# Altium PCB PSAT.PcbDoc
Units mm, origin at the board's own origin, x right, y up, seen from the top; angles counter-clockwise.
Board outline 56 x 56 mm, 2 copper layers (Top Layer, Bottom Layer); 13 components, 46 nets, 113 pads, 0 vias.
Unrouted connection lines stored in the file: 57.
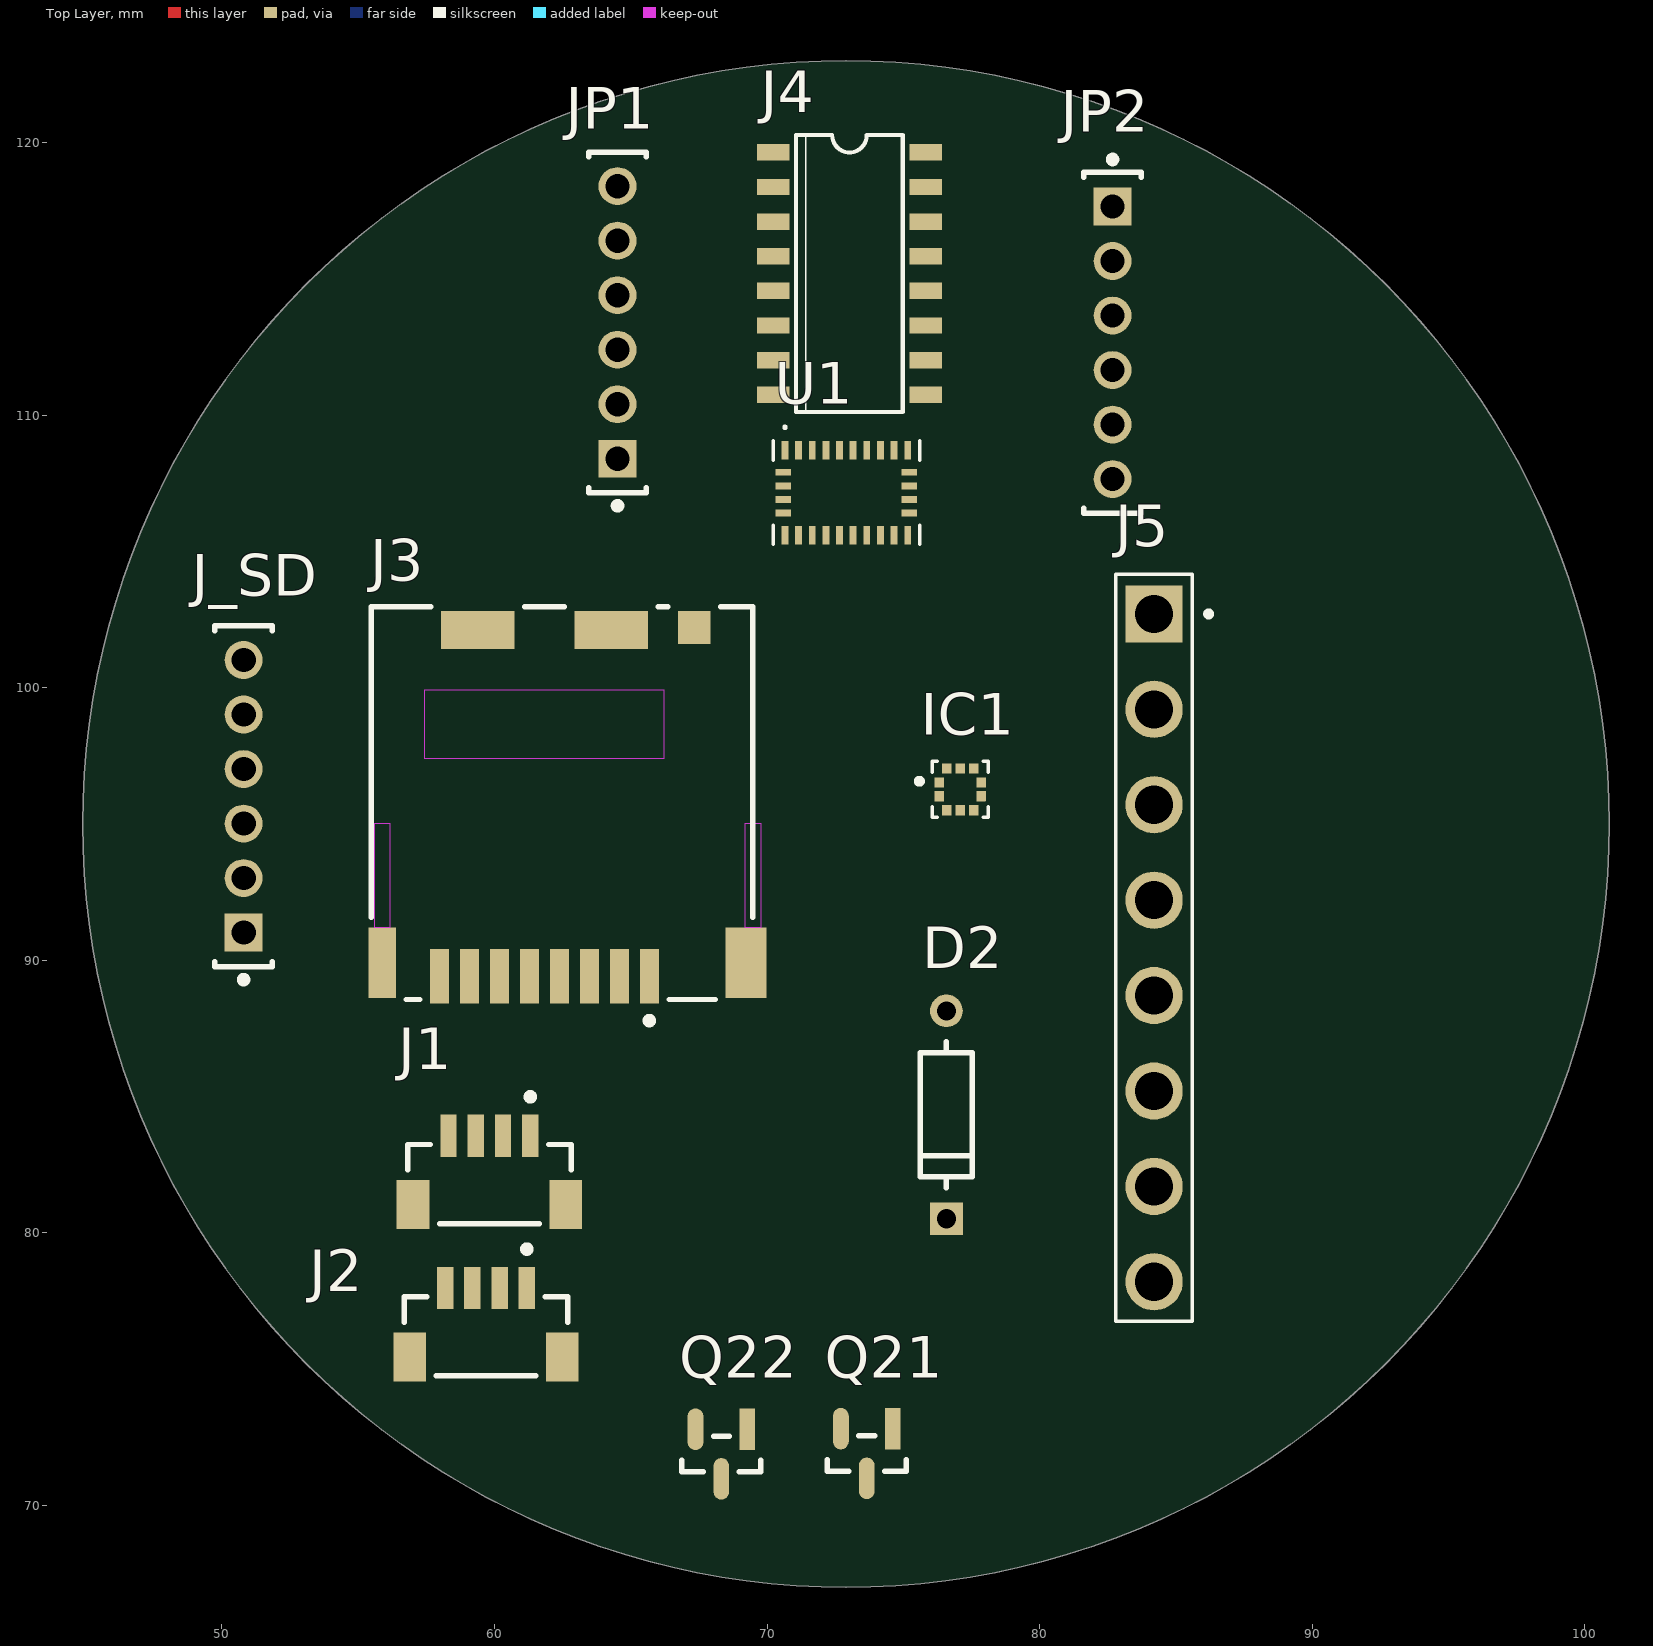
[diagram p0: Top Layer view]
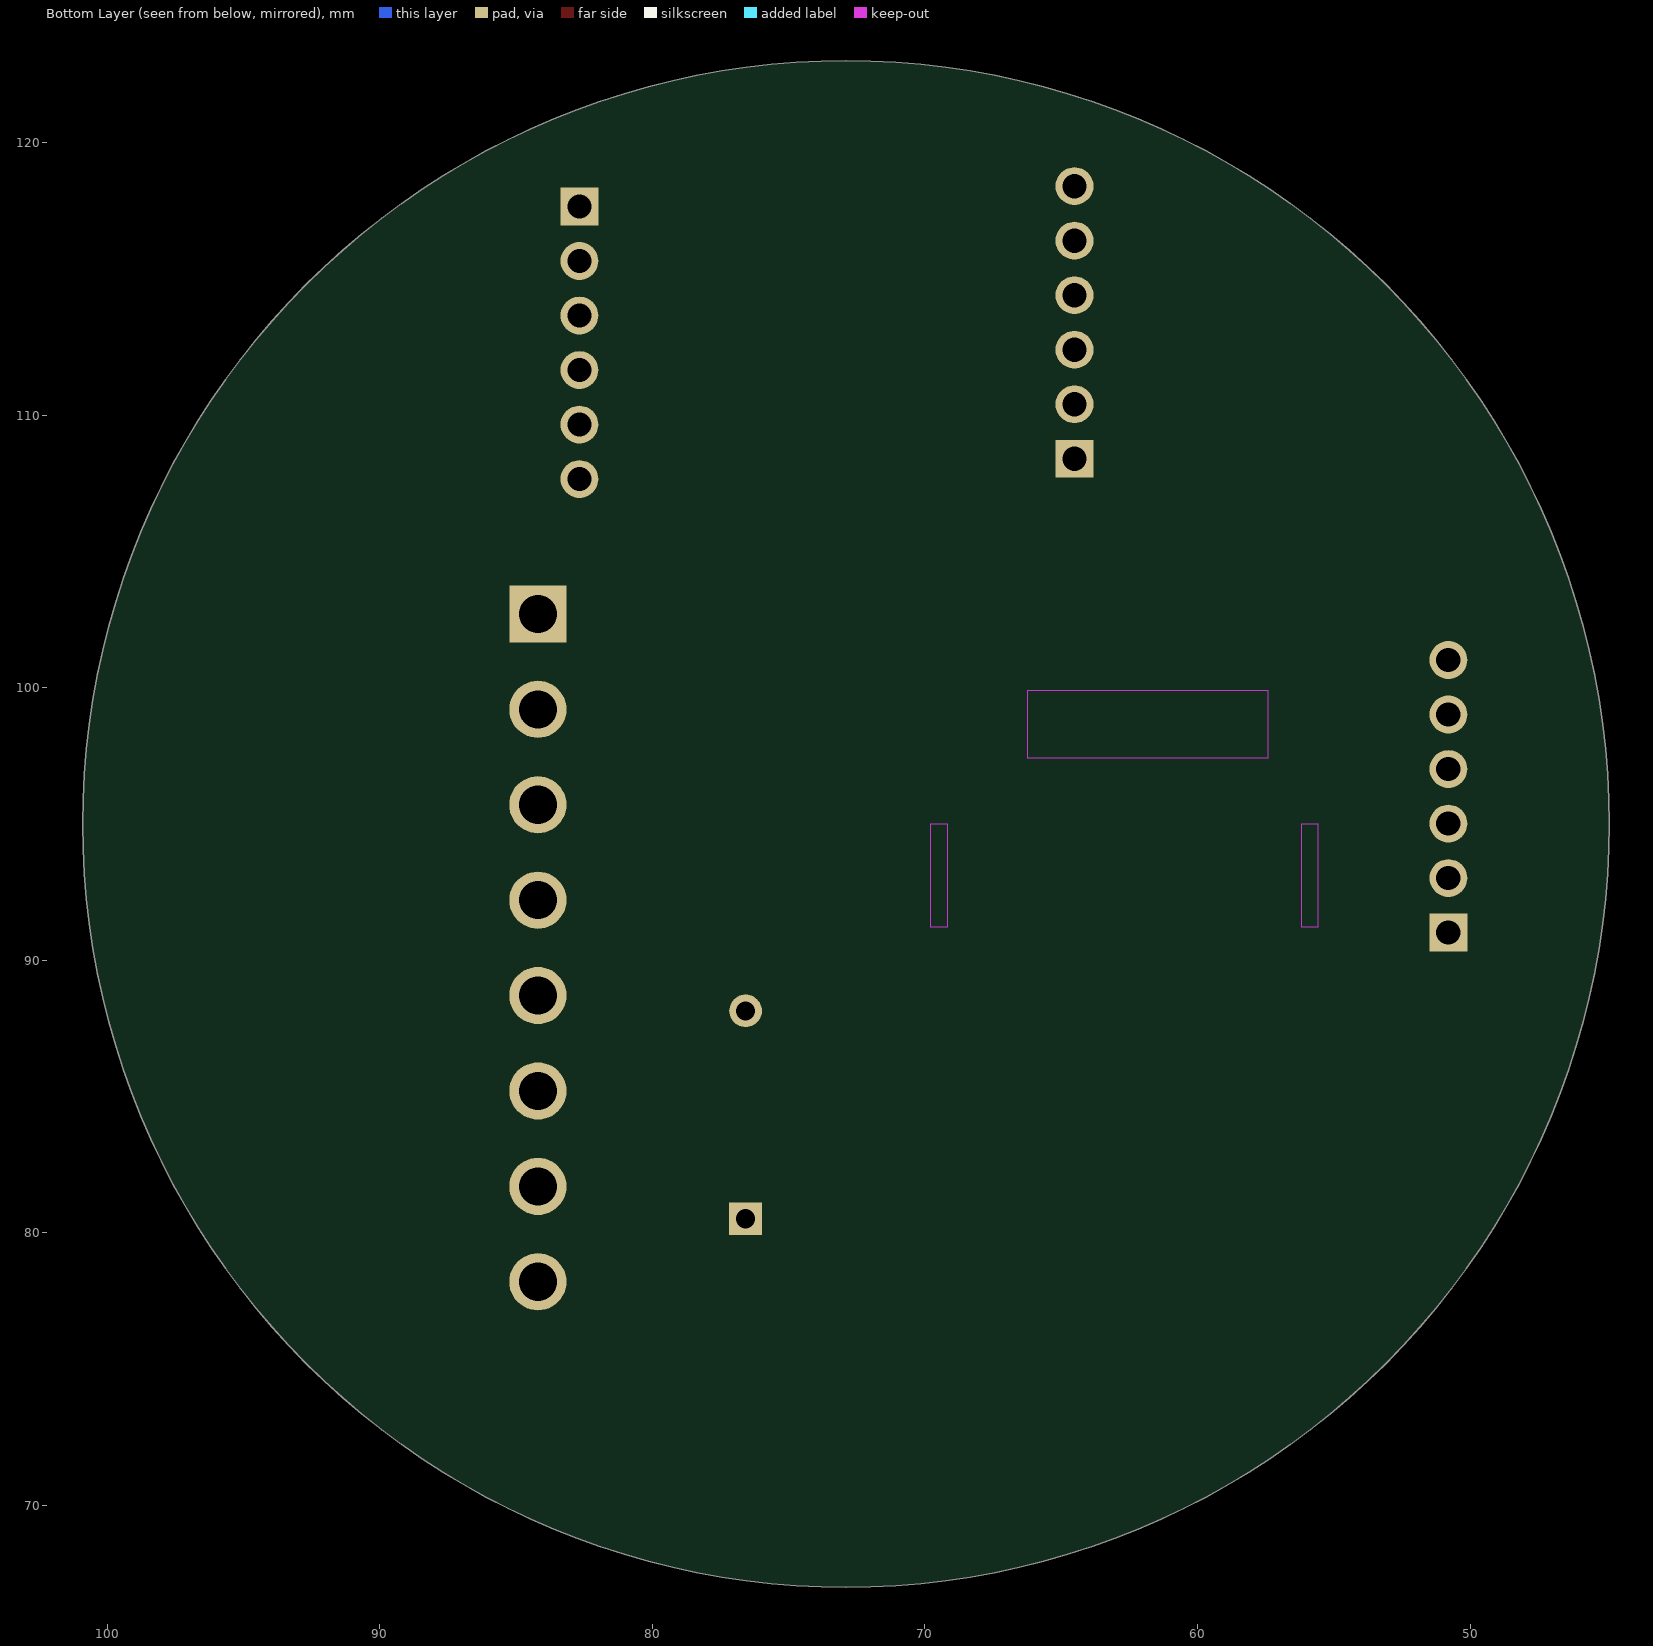
[diagram p1: Bottom Layer view, seen from below]

## Layer stack, top to bottom
Top Solder: solder mask 0.0102, Solder Resist, Dk 3.5
Top Layer: signal copper 0.0356
Dielectric 1: dielectric 0.32, FR-4, Dk 4.8
Bottom Layer: signal copper 0.0356
Bottom Solder: solder mask 0.0102, Solder Resist, Dk 3.5

## Board outline
72.898,66.996 cw(c72.898,94.996) 44.898,94.996 cw(c72.898,94.996) 72.898,122.996 cw(c72.898,94.996) 100.898,94.996 cw(c72.898,94.996)

## Design rules (kind name [scope] priority, off if disabled: settings)
Clearance [All] p1: gap=0.254 ignorepadtopadclearanceinfootprint=FALSE
PolygonConnect [All] p1: connectstyle=Relief reliefconductorwidth=0.254 reliefentries=4 polygonreliefangle="90 Angle" airgapwidth=0.254
RoutingVias [All] p1: holewidth=0.711 width=1.27 viastyle="Through Hole" minholewidth=0.711 minwidth=1.27 maxholewidth=0.711 maxwidth=1.27
SolderMaskExpansion [All] p1: expansion=0.102 istentingtop=FALSE
SupplyNets "Schematic Supply Nets_38" [InNet('NetJ3_2')] p1: voltage=0.000
SupplyNets "Schematic Supply Nets_37" [InNet('MT')] p2: voltage=0.000
SupplyNets "Schematic Supply Nets_36" [InNet('IMU_PS1')] p3: voltage=0.000
SupplyNets "Schematic Supply Nets_35" [InNet('SDA/MISO/TX')] p4: voltage=0.000
SupplyNets "Schematic Supply Nets_34" [InNet('IMU_CS')] p5: voltage=0.000
SupplyNets "Schematic Supply Nets_33" [InNet('BARO_CS')] p6: voltage=0.000
SupplyNets "Schematic Supply Nets_32" [InNet('IMU_PS0')] p7: voltage=0.000
SupplyNets "Schematic Supply Nets_30" [InNet('CS_3V')] p8: voltage=0.000
SupplyNets "Schematic Supply Nets_29" [InNet('5V')] p9: voltage=0.000
SupplyNets "Schematic Supply Nets_28" [InNet('IMU_PS1_3V')] p10: voltage=0.000
SupplyNets "Schematic Supply Nets_27" [InNet('IMU_RST')] p11: voltage=0.000
SupplyNets "Schematic Supply Nets_26" [InNet('MOSI_3V')] p12: voltage=0.000
SupplyNets "Schematic Supply Nets_25" [InNet('MCU_SCK')] p13: voltage=0.000
SupplyNets "Schematic Supply Nets_24" [InNet('MOSI')] p14: voltage=0.000
SupplyNets "Schematic Supply Nets_23" [InNet('IMU_INT')] p15: voltage=0.000
SupplyNets "Schematic Supply Nets_22" [InNet('IMU_CS_3V')] p16: voltage=0.000
SupplyNets "Schematic Supply Nets_21" [InNet('IMU_BOOT_3V')] p17: voltage=0.000
SupplyNets "Schematic Supply Nets_20" [InNet('XOUT')] p18: voltage=0.000
SupplyNets "Schematic Supply Nets_19" [InNet('SDI/SDA')] p19: voltage=0.000
SupplyNets "Schematic Supply Nets_18" [InNet('3.3V')] p20: voltage=0.000
SupplyNets "Schematic Supply Nets_17" [InNet('IMU_RST_3V')] p21: voltage=0.000
SupplyNets "Schematic Supply Nets_16" [InNet('SD_CS')] p22: voltage=0.000
SupplyNets "Schematic Supply Nets_15" [InNet('SDI_3V')] p23: voltage=0.000
SupplyNets "Schematic Supply Nets_14" [InNet('IMU_PS0_3V')] p24: voltage=0.000
SupplyNets "Schematic Supply Nets_13" [InNet('GND')] p25: voltage=0.000
SupplyNets "Schematic Supply Nets_12" [InNet('MCU_MOSI')] p26: voltage=0.000
SupplyNets "Schematic Supply Nets_11" [InNet('IMU_BOOT')] p27: voltage=0.000
SupplyNets "Schematic Supply Nets_10" [InNet('SCL/SCK/RX')] p28: voltage=0.000
SupplyNets "Schematic Supply Nets_9" [InNet('MCU_MISO')] p29: voltage=0.000
SupplyNets "Schematic Supply Nets_8" [InNet('SCK/SCL')] p30: voltage=0.000
SupplyNets "Schematic Supply Nets_7" [InNet('BARO_INT')] p31: voltage=0.000
SupplyNets "Schematic Supply Nets_6" [InNet('SDO/ADR')] p32: voltage=0.000
SupplyNets "Schematic Supply Nets_5" [InNet('SCL_3V')] p33: voltage=0.000
SupplyNets "Schematic Supply Nets_4" [InNet('BARO_CS_3V')] p34: voltage=0.000
SupplyNets "Schematic Supply Nets_3" [InNet('CDI/SDA')] p35: voltage=0.000
SupplyNets "Schematic Supply Nets_2" [InNet('SCK_3V')] p36: voltage=0.000
SupplyNets "Schematic Supply Nets_1" [InNet('SDA_3V')] p37: voltage=0.000
SupplyNets "Schematic Supply Nets" [InNet('XIN')] p38: voltage=0.000
Width [All] p1: maxlimit=0.254 minlimit=0.254 preferedwidth=0.254
30 further rules are at their usual default settings.

## Components (designator, comment, footprint, x,y, rotation, side; value= is the part's Value field where it differs from the comment)
D2 "1N4148" FP-017AG-MFG 76.581,84.328 r90 top
IC1 "BMP388" PQFN50P200X200X80-10N 77.089,96.266 r0 top
J1 "BM04B-SRSS-TBT(LF)(SN)" FP-BM04B-SRSS-TBT_LF_SN-MFG 59.817,81.788 r180 top
J2 "BM04B-SRSS-TBT(LF)(SN)" FP-BM04B-SRSS-TBT_LF_SN-MFG 59.69,76.2 r180 top
J3 "DM3CS-SF" FP-DM3CS-SF-MFG 62.484,95.758 r0 top
J4 "74HC4050D" *SO16 73.025,115.189 r270 top
J5 "1986717-8" TE_1986717-8 84.201,90.452 r270 top
J_SD "TMM-106-01-T-S" FP-TMM-106-01-T-S-MFG 50.8,96.012 r90 top
JP1 "TMM-106-01-T-S" FP-TMM-106-01-T-S-MFG 64.516,113.395 r90 top
JP2 "TMM-106-01-T-S" FP-TMM-106-01-T-S-MFG 82.677,112.649 r270 top
Q21 "BSS138" FP-318-08-IPC_B 73.66,71.903 r270 top
Q22 "BSS138" FP-318-08-IPC_B 68.326,71.882 r270 top
U1 "BNO085" IC_BNO085 72.91,107.15 r0 top

## Footprints (in the part's own frame and the unit in brackets; to place one, negate y for a bottom-side part, rotate by r counter-clockwise, add the part's x,y. Pads: shape width x height; smd on the part's side, far side on the other; paste and mask are expansions set on the pad)
*SO16 [mm]
  rect 0.6x1.2 smd: 1(-4.445,-2.8) 2(-3.175,-2.8) 3(-1.905,-2.8) 4(-0.635,-2.8) 5(0.635,-2.8) 6(1.905,-2.8) 7(3.175,-2.8) 8(4.445,-2.8) 9(4.445,2.8) 10(3.175,2.8) 11(1.905,2.8) 12(0.635,2.8) 13(-0.635,2.8) 14(-1.905,2.8) 15(-3.175,2.8) 16(-4.445,2.8)
  silkscreen extent -5.08,-1.96 5.08,1.96
FP-017AG-MFG [mm]
  rect 1.2x1.2 hole 0.7 paste-2539.97 mask+0: 1(-3.813,0)
  round 1.2 hole 0.7 paste-2539.97 mask+0: 2(3.813,0)
  silkscreen extent -2.68,-0.95 2.68,0.95, body extent -4.51,-1.05 4.51,1.05, height 0.25
FP-318-08-IPC_B [mm]
  rect 1.524x0.578 smd paste+0 mask+0: 1(-0.91,0.95)
  rrect100% 1.524x0.578 smd paste+0 mask+0: 2(-0.91,-0.95) 3(0.91,0)
  silkscreen extent -0.65,-1.45 0.65,1.45, body extent -1.92,-1.7 1.92,1.7, height 0.25
FP-BM04B-SRSS-TBT_LF_SN-MFG [mm]
  rect 0.6x1.55 smd paste+0 mask+0: 1(-1.5,-1.775) 2(-0.5,-1.775) 3(0.5,-1.775) 4(1.5,-1.775)
  rect 1.2x1.8 smd paste+0 mask+0: 5(-2.8,0.75) 6(2.8,0.75)
  silkscreen extent -3,-3.32 3,1.45, body extent -3.5,-2.65 3.5,1.75, height 0.25
FP-DM3CS-SF-MFG [mm]
  rect 0.7x2 smd paste+0 mask+0: 1(3.2,-6.35) 2(2.1,-6.35) 3(1,-6.35) 4(-0.1,-6.35) 5(-1.2,-6.35) 6(-2.3,-6.35) 7(-3.4,-6.35) 8(-4.5,-6.35)
  rect 2.7x1.4 smd paste+0 mask+0: 9(-3.1,6.35) 10(1.8,6.35)
  rect 1.2x1.2 smd paste+0 mask+0: 11(4.85,6.45)
  rect 1x2.6 smd paste+0 mask+0: 12(-6.6,-5.85)
  rect 1.5x2.6 smd paste+0 mask+0: 13(6.75,-5.85)
  Keep-Out Layer region: -6.9,-4.55 -6.3,-4.55 -6.3,-0.75 -6.9,-0.75
  Keep-Out Layer region: 6.7,-4.55 7.3,-4.55 7.3,-0.75 6.7,-0.75
  Keep-Out Layer region: -5.05,1.65 3.75,1.65 3.75,4.15 -5.05,4.15
  silkscreen extent -7,-8.1 7,7.2, body extent -7.2,-7.45 7.6,7.3, height 0.25
FP-TMM-106-01-T-S-MFG [mm]
  rect 1.39x1.39 hole 0.89 paste-2539.97 mask+0: 1(-5,0)
  round 1.39 hole 0.89 paste-2539.97 mask+0: 2(-3,0) 3(-1,0) 4(1,0) 5(3,0) 6(5,0)
  silkscreen extent -6.85,-1.05 6.25,1.05, body extent -6.1,-2.07 6.1,2.07, height 0.25
IC_BNO085 [mm]
  rect 0.25x0.675 smd: 1(-2.25,1.562) 6(-2.25,-1.562) 7(-1.75,-1.562) 8(-1.25,-1.562) 9(-0.75,-1.562) 10(-0.25,-1.562) 11(0.25,-1.562) 12(0.75,-1.562) 13(1.25,-1.562) 14(1.75,-1.562) 15(2.25,-1.562) 20(2.25,1.562) 21(1.75,1.562) 22(1.25,1.562) 23(0.75,1.562) 24(0.25,1.562) 25(-0.25,1.562) 26(-0.75,1.562) 27(-1.25,1.562) 28(-1.75,1.562)
  rect 0.575x0.25 smd: 2(-2.312,0.75) 3(-2.312,0.25) 4(-2.312,-0.25) 5(-2.312,-0.75) 16(2.312,-0.75) 17(2.312,-0.25) 18(2.312,0.25) 19(2.312,0.75)
  silkscreen extent -2.69,-1.9 2.69,2.45, body extent -2.6,-1.9 2.6,1.9, height 1.18
PQFN50P200X200X80-10N [mm]
  rrect9% 0.35x0.38 smd: 1(-0.765,0.25) 2(-0.765,-0.25) 3(-0.5,-0.765) 4(0,-0.765) 5(0.5,-0.765) 6(0.765,-0.25) 7(0.765,0.25) 8(0.5,0.765) 9(0,0.765) 10(-0.5,0.765)
  silkscreen extent -1.6,-1.03 1.03,1.03
TE_1986717-8 [mm]
  rect 2.1x2.1 / inner round 2.1 / far side rect 2.1x2.1 hole 1.4: 1(-12.25,0)
  round 2.1 hole 1.4: 2(-8.75,0) 3(-5.25,0) 4(-1.75,0) 5(1.75,0) 6(5.25,0) 7(8.75,0) 8(12.25,0)
  silkscreen extent -13.7,-1.4 13.7,2.1, body extent -13.7,0 13.7,12.5, height 1.4

## Part data
D2: library part CMP-07163-000046-1, "DIODE GEN PURP 100V 200MA DO35", Average Rectified Current=200mA, Capacitance=4pF, Case/Package=DO-35, Current=4A, Forward Current=300mA, Forward Voltage=1V, Max Forward Surge Current (Ifsm)=1A, Max Operating Temperature=175°C, Max Power Dissipation=500mW, Max Repetitive Reverse Voltage (Vrrm)=100V, Max Reverse Current=5uA, Min Operating Temperature=-65°C, Package Quantity=2000, Contact Plating=Tin, Current Rating=200mA, Diameter=1.91mm, Element Configuration=Single, Height=4.56mm, Lead Free="Lead Free", Length=4.56mm, Max Reverse Voltage (DC)=100V, Max Surge Current=4A, Mount="Through Hole", Number of Pins=2, Output Current=200mA, Outside Diameter=1.85mm, Packaging=Bulk, Peak Non-Repetitive Surge Current=4A, Polarity=Standard, Power Dissipation=500mW, Radiation Hardening=No, REACH SVHC="No SVHC", Recovery Time=4ns, Reverse Recovery Time=4ns, Reverse Voltage=100V, Series=-, Voltage=100V, Voltage Rating (DC)=100V, Weight=0.01lb, Width=1.91mm
IC1: "P-Sensor SPI I2C 1, 25 Bar SMD", Package=None, Availability=Unavailable, MP=BMP388, Price=None
J1 J2: library part CMP-17439-000370-1, "CONN HEADER SMD 4POS 1MM", Color=Natural, Flammability Rating="UL94 V-0", Package Quantity=1, Voltage Rating=50V, Connector Type=Header, Contact Finish - Mating=TIN, Contact Material="Copper Alloy", Contact Plating=Tin, Contact Shape=Square, Contact Type="Male Pin", Fastening Type=Pull, Insulation Color=Natural, Insulation Material=Nylon, Lead Free="Lead Free", Mated Stacking Heights=4.9mm, Mount="Surface Mount", Number of Positions=4, Number of Rows=1, Packaging="Cut Tape", Pitch=0.039inch, Series=SR, Termination=Solder
J3: library part CMP-11597-000003-1, "CONN MICRO SD CARD HINGED TYPE", Contact Resistance=100mR, Current Rating=500mA, Flammability Rating="UL94 V-0", Insulation Resistance=1GR, Max Operating Temperature=85°C, Min Operating Temperature=-25°C, Package Quantity=1, Voltage Rating (AC)=125V, Connector Type=Connector, Contact Material=Gold, Contact Plating=Gold, Depth=1.83mm, Gender=Female, Housing Material=Polymer, Lead Free="Lead Free", Length=14.1mm, Max Current Rating=500mA, Mount="Surface Mount", Number of Contacts=8, Number of Positions=8, Number of Rows=1, Orientation="Right Angle", Packaging="Tape and Reel", Pitch=1.1mm, Radiation Hardening=No, Termination=Solder, Width=13.8mm
J5: "8 Position Terminal Block Header, Male Pins, Unshrouded 0.138 (3.50mm) Vertical - Through Hole", Package=None, Centerline_Pitch="3.5 mm[.138 in]", Check_prices=https://www.snapeda.com/parts/1986717-8/TE+Connectivity+AMP+Connectors/view-part/?ref=eda, MF="TE Connectivity", MP=1986717-8, Number_of_Positions=8, SnapEDA_Link=https://www.snapeda.com/parts/1986717-8/TE+Connectivity+AMP+Connectors/view-part/?ref=snap
J_SD JP1 JP2: library part CMP-02766-001694-1, "CONN HEADER VERT 6POS 2MM", Color=Black, Max Operating Temperature=105°C, Max Voltage Rating (AC)=500V, Min Operating Temperature=-55°C, Connector Type="Male Pin", Contact Material=Bronze, Contact Mating Length=0.126inch, Contact Plating=Tin, Contact Type="Male Pin", Depth=1.97mm, Gender=Male, Housing Color=Black, Housing Material=Polymer, Lead Free="Lead Free", Length=12mm, Mount="Through Hole", Number of Contacts=6, Number of Positions=6, Number of Rows=1, Orientation=Straight, Packaging=Bulk, Pitch=2mm, Radiation Hardening=No, REACH SVHC="No SVHC", RoHS Compliant=Yes, Series="FleXYZ™ TMM", Termination=Solder, Width=1.97mm
Q21 Q22: library part CMP-07173-000101-1, "MOSFET N-CH 50V 220MA SOT-23", Case/Package=SOT-23, Continuous Drain Current (ID)=220mA, Drain to Source Breakdown Voltage=50V, Drain to Source Resistance=3.5R, Gate to Source Voltage (Vgs)=20V, Input Capacitance=27pF, Max Operating Temperature=150°C, Max Power Dissipation=360mW, Min Operating Temperature=-55°C, On-State Resistance=6R, Package Quantity=1, Threshold Voltage=1.3V, Contact Plating=Tin, Current Rating=220mA, Drain to Source Voltage (Vdss)=50V, Dual Supply Voltage=50V, Element Configuration=Single, Fall Time=9ns, Height=0.93mm, Lead Free="Lead Free", Length=2.92mm, Mount="Surface Mount", Nominal Vgs=1.3V, Number of Elements=1, Number of Pins=3, Packaging="Tape and Reel", Power Dissipation=360mW, Radiation Hardening=No, Rds On Max=3.5R, REACH SVHC="No SVHC", Rise Time=9ns, Termination=SMD/SMT, Turn-Off Delay Time=20ns, Turn-On Delay Time=2.5ns, Voltage Rating (DC)=50V, Weight=0.03g, Width=1.3mm
U1: "Accelerometer, Gyroscope, Magnetometer, 9 Axis Sensor IÂ²C, SPI, UART Output", Package="TFLGA-28 Hillcrest Laboratories", Check_prices=https://www.snapeda.com/parts/BNO085/Hillcrest+Laboratories%252C+Inc./view-part/?ref=eda, MF="Hillcrest Laboratories,", MP=BNO085, SnapEDA_Link=https://www.snapeda.com/parts/BNO085/Hillcrest+Laboratories%252C+Inc./view-part/?ref=snap
J4: Check_prices=https://www.snapeda.com/parts/74HC4050D/Toshiba/view-part/?ref=eda, SnapEDA_Link=https://www.snapeda.com/parts/74HC4050D/Toshiba/view-part/?ref=snap

## Nets (pads, with @x,y where several pads share a name; then routed paths per layer and width w, separated by ;. In a path a pad name is that pad's centre, name@x,y a point inside that pad or via, vN(x,y) a via of type N, cw(c..) or ccw(c..) an arc to the next point about the centre after c; other vN are vias at no path point)
3.3V: IC1.1 IC1.10 J1.2 J2.2 J3.4 J4.1 J5.1 J5.2 JP1.1 JP1.2 Q21.1 Q22.1 U1.3 U1.28
5V: J_SD.5
BARO_CS: D2.1 J5.7
BARO_CS_3V: IC1.6
BARO_INT: IC1.7 J5.8
CDI/SDA: J5.6
CS_3V: J_SD.3 J_SD.4
GND: IC1.3 IC1.8 IC1.9 J1.1 J2.1 J3.6 J3.9 J3.11 J3.12 J3.13 J4.8 J5.3 JP1.3 U1.2 U1.10 U1.25
IMU_BOOT: J4.7 JP2.1
IMU_BOOT_3V: J4.6 U1.4
IMU_CS: J4.9 JP2.6
IMU_CS_3V: J4.10 U1.18
IMU_INT: JP1.6 U1.14
IMU_PS0: J4.3 JP2.2
IMU_PS0_3V: J4.2 U1.6
IMU_PS1: J4.5 JP2.3
IMU_PS1_3V: J4.4 U1.5
IMU_RST: J4.14 JP2.4
IMU_RST_3V: J4.15 U1.11
MCU_MISO: J3.7
MCU_MOSI: 
MCU_SCK: 
MOSI: J4.11 JP2.5
MOSI_3V: J4.12 J_SD.2 J_SD.6 U1.17
MT: J1.5 J1.6 J2.5 J2.6
NetC4_1: U1.9
NetD1_1: 
NetD2_2: D2.2
NetIC1_5: IC1.5
NetJ3_2: J3.2
NetJ3_3: J3.3
NetJ3_5: J3.5
NetR12_2: 
NetR13_2: 
SCK/SCL: J5.4 Q21.3
SCK_3V: IC1.2 J_SD.1 Q21.2
SCL/SCK/RX: J1.4 J2.4 JP1.4
SCL_3V: U1.19
SD_CS: 
SDA/MISO/TX: J1.3 J2.3 JP1.5
SDA_3V: U1.20
SDI/SDA: Q22.3
SDI_3V: IC1.4 Q22.2
SDO/ADR: J5.5
XIN: U1.27
XOUT: U1.26
pads on no net: J3.1 J3.8 J3.10 J4.13 J4.16 U1.1 U1.7 U1.8 U1.12 U1.13 U1.15 U1.16 U1.21 U1.22 U1.23 U1.24